# Altium PCB AccShelf2_GND_Plane.PcbDoc
Units mil, origin at the board's own origin, x right, y up, seen from the top; angles counter-clockwise.
Board outline 4881.89 x 2165.35 mil, 2 copper layers (Top Layer, Bottom Layer); 8 components, 35 nets, 114 pads, 71 vias.
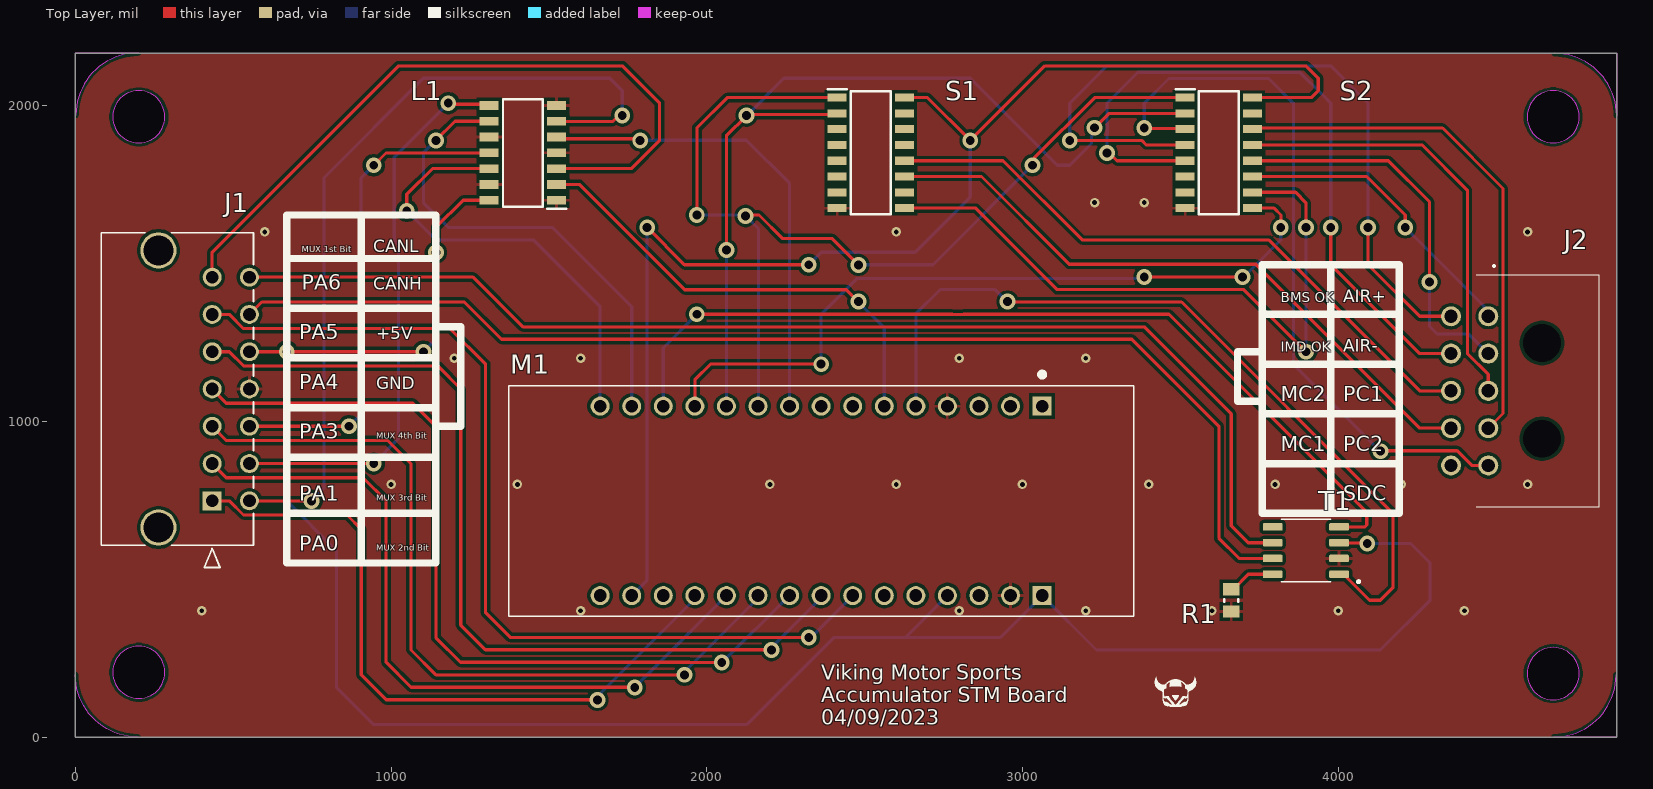
[diagram p0: Top Layer view]
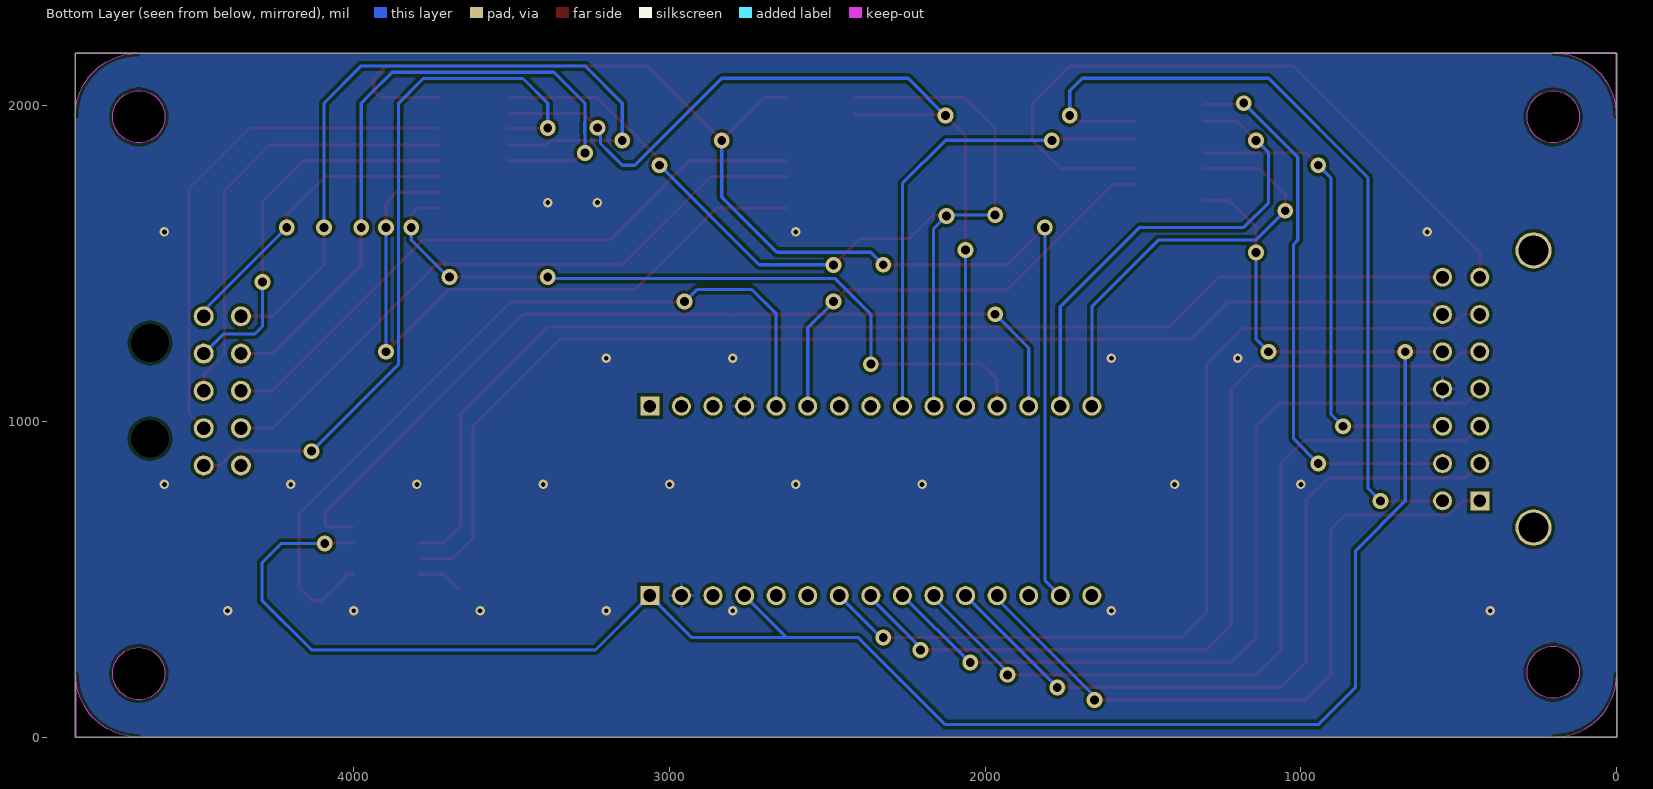
[diagram p1: Bottom Layer view, seen from below]
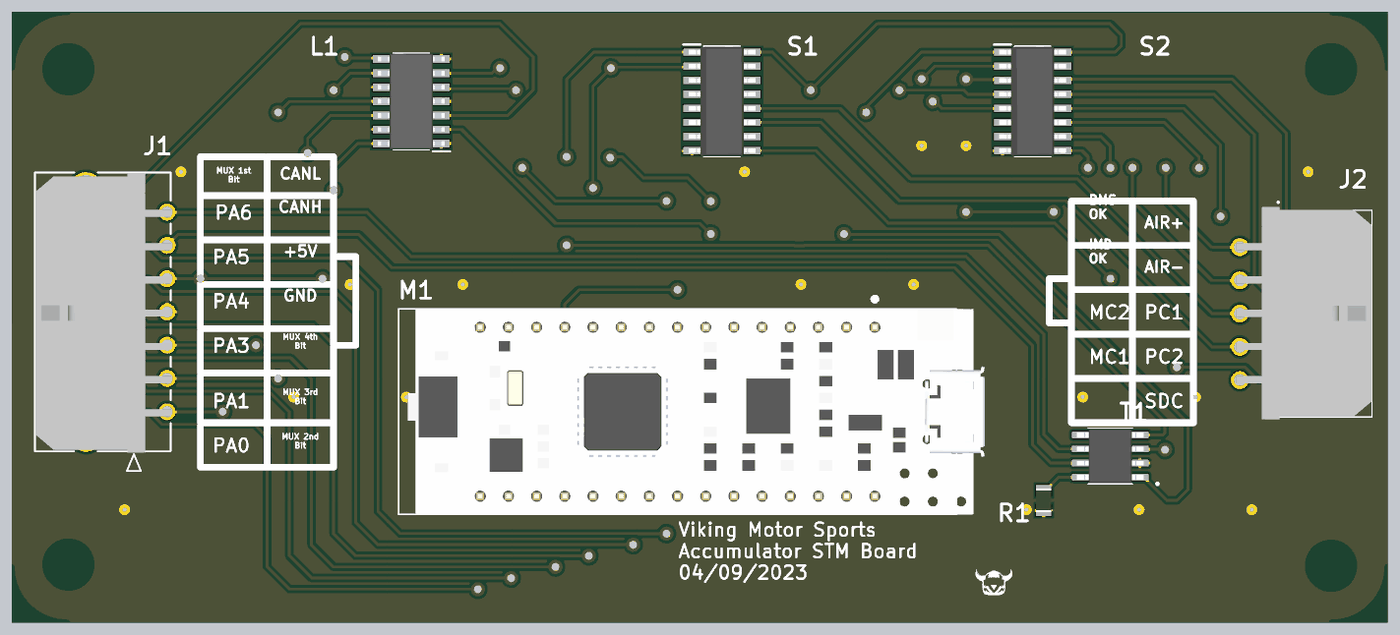
[diagram p2: 3D render of the assembled board from above, using the file's embedded part models]

## Layer stack, top to bottom
Top Solder: solder mask 0.4, Solder Resist, Dk 3.5
Top Layer: signal copper 1.4
Dielectric 1: dielectric 12.6, FR-4, Dk 4.8
Bottom Layer: signal copper 1.4
Bottom Solder: solder mask 0.4, Solder Resist, Dk 3.5

## Board outline
0,0 0,2165.35 4881.89,2165.35 4881.89,0
cut-out: 1.47,2167 198.32,2167 ccw(c198.32,1970.15) 1.47,1970.15
cut-out: 4881.89,1968.68 ccw(c4685.21,1968.68) 4685.21,2165.35 4881.89,2165.35
cut-out: 4683.68,0 ccw(c4683.68,196.68) 4880.35,196.68 4880.35,0
cut-out: 0,0 196.85,0 cw(c196.85,196.85) 0,196.85
cut-out: 118.11,1964.43 ccw(c200.79,1964.43) 200.79,1881.76 ccw(c200.79,1964.43) 283.46,1964.43 ccw(c200.79,1964.43) 200.79,2047.11 ccw(c200.79,1964.43)
cut-out: 118.11,204.99 ccw(c200.79,204.99) 200.79,122.32 ccw(c200.79,204.99) 283.46,204.99 ccw(c200.79,204.99) 200.79,287.67 ccw(c200.79,204.99)
cut-out: 4598.43,200.92 ccw(c4681.1,200.92) 4681.1,118.24 ccw(c4681.1,200.92) 4763.78,200.92 ccw(c4681.1,200.92) 4681.1,283.6 ccw(c4681.1,200.92)
cut-out: 4598.29,1964.57 ccw(c4680.97,1964.57) 4680.97,1881.89 ccw(c4680.97,1964.57) 4763.65,1964.57 ccw(c4680.97,1964.57) 4680.97,2047.24 ccw(c4680.97,1964.57)

## Design rules (kind name [scope] priority, off if disabled: settings)
Clearance [All] p1: gap=10 ignorepadtopadclearanceinfootprint=FALSE except(0: Arc-Hole Track-Hole SMDPad-Hole THPad-Hole Via-Hole Fill-Hole Poly-Hole Region-Hole Text-Hole)
PolygonConnect [All] p1: connectstyle=Relief reliefconductorwidth=10 reliefentries=4 polygonreliefangle="90 Angle" airgapwidth=10
RoutingVias [All] p1: holewidth=28 width=50 viastyle="Through Hole" minholewidth=28 minwidth=50 maxholewidth=28 maxwidth=50
SolderMaskExpansion [All] p1: expansion=4 istentingtop=FALSE
Width [All] p1: maxlimit=10 minlimit=10 preferedwidth=10
30 further rules are at their usual default settings.

## Components (designator, comment, footprint, x,y, rotation, side; value= is the part's Value field where it differs from the comment)
J1 "14 Pin Dual-Inline Connector" "14 Pin Dual In-Line Connector" 433.07,748.03 r270 top
J2 "10 Pin Dual In-Line Connector" "10 Pin Dual In-Line Connector" 4475.59,1332.68 r90 top
L1 "74AHCT125S14-13" "Level Shifter" 1417.32,1850.39 r180 top
M1 "STM32" "STM Footprint" 2362.2,748.03 r270 top
R1 "RC0805FR-0710KL" RESC2013X60X35NL10T20 3661.42,433.07 r90 top
S1 "SN74HC165QDRQ1" "Shift Register" 2519.68,1850.39 r0 top
S2 "SN74HC165QDRQ1" "Shift Register" 3622.05,1850.39 r0 top
T1 "CAN Transceiver" "CAN Transceiver" 3897.64,590.55 r180 top

## Footprints (in the part's own frame and the unit in brackets; to place one, negate y for a bottom-side part, rotate by r counter-clockwise, add the part's x,y. Pads: shape width x height; smd on the part's side, far side on the other; paste and mask are expansions set on the pad)
"10 Pin Dual In-Line Connector" [mm]
  round 1.605 hole 1.07: 1(0,0) 2(-3,0) 3(-6,0) 4(-9,0) 5(-12,0) 6(0,3) 7(-3,3) 8(-6,3) 9(-9,3) 10(-12,3)
  round 1.525 hole 3.05 unplated: MH1(-9.85,-4.32) MH2(-2.15,-4.32)
  silkscreen extent -15.33,-8.92 4.1,0.99, body extent -15.54,-8.89 3.61,3.35, height 8.78
"14 Pin Dual In-Line Connector" [mm]
  rect 1.52x1.52 / inner round 1.524 / far side rect 1.52x1.52 hole 1.02 paste-0.76 mask+0.076: 1(0,0)
  round 1.52 / inner round 1.524 / far side round 1.52 hole 1.02 paste-0.76 mask+0.076: 2(-3,0) 3(-6,0) 4(-9,0) 5(-12,0) 6(-15,0) 7(-18,0) 8(0,3) 9(-3,3) 10(-6,3) 11(-9,3) 12(-12,3) 13(-15,3) 14(-18,3)
  round 2.91 / inner round 1.524 / far side round 2.91 hole 2.41 paste-1.455 mask+0.076: P1(2.15,-4.32) P2(-20.15,-4.32)
  silkscreen extent -21.57,-8.92 5.35,3.32, body extent -21.51,-8.89 3.68,3.35, height 8.78
"CAN Transceiver" [mm]
  rrect25% 1.58x0.6 smd: 1(-2.67,1.905) 2(-2.67,0.635) 3(-2.67,-0.635) 4(-2.67,-1.905) 5(2.67,-1.905) 6(2.67,-0.635) 7(2.67,0.635) 8(2.67,1.905)
  silkscreen extent -4.35,-2.52 1.99,2.6, body extent -3,-2.45 3,2.45, height 1.76
"Level Shifter" [mm]
  rect 1.528x0.7 smd: 1(-2.711,3.81) 2(-2.711,2.54) 3(-2.711,1.27) 4(-2.711,0) 5(-2.711,-1.27) 6(-2.711,-2.54) 7(-2.711,-3.81) 8(2.711,-3.81) 9(2.711,-2.54) 10(2.711,-1.27) 11(2.711,0) 12(2.711,1.27) 13(2.711,2.54) 14(2.711,3.81)
  silkscreen extent -3.47,-4.32 1.6,4.51, body extent -10,-3.38 10,3.38, height 5.8
RESC2013X60X35NL10T20 [mm] "Chip Resistor, 2-Leads, Body 2.1x1.35mm, IPC Medium Density"
  rect 1x1.35 smd: 1(-0.9,0) 2(0.9,0)
  silkscreen extent -0.1,-0.58 0.1,0.58, body extent -1.05,-0.68 1.05,0.67, height 0.6
"Shift Register" [mm]
  rect 1.525x0.65 smd: 1(-2.712,4.445) 2(-2.712,3.175) 3(-2.712,1.905) 4(-2.712,0.635) 5(-2.712,-0.635) 6(-2.712,-1.905) 7(-2.712,-3.175) 8(-2.712,-4.445) 9(2.712,-4.445) 10(2.712,-3.175) 11(2.712,-1.905) 12(2.712,-0.635) 13(2.712,0.635) 14(2.712,1.905) 15(2.712,3.175) 16(2.712,4.445)
  silkscreen extent -3.47,-4.95 1.6,5.12, body extent -10,-3.38 10,3.38, height 5.8
"STM Footprint" [mm]
  rect 1.53x1.53 hole 1.02: 1(-7.62,17.78) 16(7.62,17.78)
  round 1.53 hole 1.02: 2(-7.62,15.24) 3(-7.62,12.7) 4(-7.62,10.16) 5(-7.62,7.62) 6(-7.62,5.08) 7(-7.62,2.54) 8(-7.62,0) 9(-7.62,-2.54) 10(-7.62,-5.08) 11(-7.62,-7.62) 12(-7.62,-10.16) 13(-7.62,-12.7) 14(-7.62,-15.24) 15(-7.62,-17.78) 17(7.62,15.24) 18(7.62,12.7) 19(7.62,10.16) 20(7.62,7.62) 21(7.62,5.08) 22(7.62,2.54) 23(7.62,0) 24(7.62,-2.54) 25(7.62,-5.08) 26(7.62,-7.62) 27(7.62,-10.16) 28(7.62,-12.7) 29(7.62,-15.24) 30(7.62,-17.78)
  silkscreen extent -10.36,-25.14 9.27,25.14, body extent -9.27,-24.29 9.27,27.71, height 8.51

## Part data
J1: "Rectangular Power Connector, 14 Contact(s), Male, Solder Terminal", Flammability Rating="UL94 V-0", Manufacturer=Molex, Manufacturer Part Number=212528-1200, Package=None, Supplier Part Number=538-212528-1200, Availability=Unavailable, Category="Headers and Wire Housings", ComponentLink1Description=http://datasheet.octopart.com/2125281200-Molex-datasheet-147959482.pdf?src-supplier=Rs, ComponentLink1URL=http://datasheet.octopart.com/2125281200-Molex-datasheet-147959482.pdf?src-supplier=Rs, ComponentLink2Description=https://datasheet.ciiva.com:443/pdfs/VipMasterIC/IC/MOLE/MOLE-S-A0003112043/MOLE-S-A0003112043-1.pdf?src-supplier=IHS+Markit, ComponentLink2URL=https://datasheet.ciiva.com:443/pdfs/VipMasterIC/IC/MOLE/MOLE-S-A0003112043/MOLE-S-A0003112043-1.pdf?src-supplier=IHS+Markit, ComponentLink3Description=https://datasheet.ciiva.com/6841/430450223-sd-6841489.pdf?src-supplier=Digi-Key, ComponentLink3URL=https://datasheet.ciiva.com/6841/430450223-sd-6841489.pdf?src-supplier=Digi-Key, Connector Type=Power,Rectangular, Contact Gender=Male, DIN Conformance=No, Empty Shell=No, Filter Feature=No, IEC Conformance=No, Mating Information="MULTIPLE MATING PARTS AVAILABLE", MF="{'manufacturer': u'Molex'}", MIL Conformance=No, Mixed Contacts=No, Mounting Technology=Board, MP=2125281200, Number of Contacts=14, Option="General Purpose", Price=None, Pricing="1=3.35000, 10=2.96000, 50=2.96000, 100=2.96000, 1000=2.28000, 10000=1.94000 (USD)", Reach SVHC Compliant=Yes, RoHS=No, RoHS Compliant=Yes, Shell Material=Polyethylene, Stock=1070, Supplier=Mouser, Termination=Solder
J2: "Connector Wire to Board Header 10 Position 3mm Solder Right Angle Thru-Hole Tray", Arrow Part Number=0430451000, Color=Black, Contact Resistance=10mR, Flammability Rating="UL94 V-0", Manufacturer=Molex, Max Operating Temperature=105°C, Max Voltage Rating (AC)=250V, Min Operating Temperature=-40°C, Mouser Part Number=N/A, Supplier Part Number=538-43045-1000, Arrow Price/Stock=https://www.arrow.com/en/products/0430451000/molex?region=europe, Category=Uncategorized, Connector Type="Male Pin", Contact Material=Brass, Contact Plating=Tin, Contact Type="Male Pin", Datasheet Link=https://www.molex.com/pdm_docs/sd/430451000_sd.pdf, Depth=12.2mm, Fastening Type=Ramp, Geometry.Height=9.02mm, Housing Color=Black, Housing Material=Polymer, Length=19.15mm, Manufacturer Part Number=0430451000, Manufacturer_Name=Molex, Manufacturer_Part_Number=0430451000, Mounting Technology="Through Hole", Mouser Price/Stock=https://www.mouser.co.uk/ProductDetail/Molex/0430451000?qs=PBcRNPEHKsoaAZSFihkrKw%3D%3D, Number of Contacts=10, Number of Positions=10, Number of Rows=2, Orientation="Right Angle", Packaging=Tray, Pitch=0.118inch, Pricing="1=2.88000, 10=2.54000, 50=2.54000, 100=2.02000, 500=1.97000, 1000=1.68000, 2448=1.55000, 4896=1.49000, 10000=1.49000, 11016=1.44000 (USD)", RoHS=Yes, RoHS Compliant=Yes, Row Spacing=0.118inch, Series="Micro-Fit 3.0™ 43045", Stock=6331, Supplier=Mouser, Termination=Solder
L1: library part "Level Shifter", "Bus Driver, AHCT/VHCT/VT Series, 4-Func, 1-Bit, True Output, CMOS, PDSO14", Case/Package=SOP, Load Capacitance (CL)=50pF, Manufacturer=Diodes, Manufacturer_Name="Diodes Inc.", Max Operating Temperature=125°C, Max Supply Voltage=5.5V, Min Operating Temperature=-40°C, Min Supply Voltage=4.5V, Mouser Part Number=621-74AHCT125S14-13, Nominal Supply Voltage=5V, Package Body Material=Plastic, Package Equivalence Code=SOP14,.25, Package Shape=Rectangular, Package Style="SMALL OUTLINEMeter", Peak Reflow Temperature (Cel)=260°C, Power Supply Current-Max (ICC)=40uA, Temperature Grade=AUTOMOTIVE, Time @ Peak Reflow Temperature-Max (s)=40s, Arrow Part Number=74AHCT125S14-13, Arrow Price/Stock=https://www.arrow.com/en/products/74ahct125s14-13/diodes-incorporated?region=nac, Category="Buffers, Drivers and Transceivers", Channels=4, ComponentLink1Description=https://datasheet.ciiva.com:443/pdfs/VipMasterIC/IC/DIOD/DIODS15860/DIODS15860-1.pdf?src-supplier=IHS+Markit, ComponentLink1URL=https://datasheet.ciiva.com:443/pdfs/VipMasterIC/IC/DIOD/DIODS15860/DIODS15860-1.pdf?src-supplier=IHS+Markit, ComponentLink2Description=https://datasheet.ciiva.com/25651/74ahct125-25651120.pdf?src-supplier=Digi-Key, ComponentLink2URL=https://datasheet.ciiva.com/25651/74ahct125-25651120.pdf?src-supplier=Digi-Key, ComponentLink3Description=https://datasheet.ciiva.com/29883/74ahct125-29883446.pdf?src-supplier=Avnet, ComponentLink3URL=https://datasheet.ciiva.com/29883/74ahct125-29883446.pdf?src-supplier=Avnet, Control Type="ENABLE LOW", Datasheet Link=http://uk.rs-online.com/web/p/products/7988941, Geometry.Height=1.73mm, Height - Seated (Max)=1.73mm, JESD-30 Code=R-PDSO-G14, JESD-609 Code=e3, Length=8.635mm, Logic Type="BUS DRIVER", Manufacturer Part Number=74AHCT125S14-13, Manufacturer_Part_Number=74AHCT125S14-13, Max I(ol)=8mA, Moisture Sensitivity Level=1, Mouser Price/Stock=https://www.mouser.co.uk/ProductDetail/Diodes-Incorporated/74AHCT125S14-13?qs=pYVYkI7xuRUA0d%2Fp2SGl5A%3D%3D, Number of Bits=1, Number of Ports=2, Output Characteristics=3-STATE, Output Polarity=True, Packaging="Tape and Reel", Pins=14, Power Supplies=5V, Pricing="2500=0.06080, 5000=0.05862, 10000=0.05686, 15000=0.05520, 20000=0.05312, 25000=0.05229, 250000=0.05146 (USD)", Prop. Delay@Nom-Sup=9.5ns, Propagation Delay (tpd)=9.5ns, Qualification Status="Not Qualified", Reach SVHC Compliant=Yes, RoHS=Yes, RoHS Compliant=Yes, Stock=22500, Supplier=Avnet, Supplier Part Number=74AHCT125S14-13, Surface Mount=Yes, Technology=CMOS, Terminal Finish=Tin, Terminal Form="Gull Wing", Terminal Pitch=1.27mm, Terminal Position=DUAL, Width=3.895mm
M1: "STM32 Nucleo-32 development board with STM32F303K8 MCU, supports Arduino connectivity", Manufacturer=STMicroelectronics, Manufacturer Part Number=NUCLEO-F303K8, Supplier Part Number=68Y1244, Category="Embedded Processors and Controllers", ComponentLink1Description=http://www.farnell.com/datasheets/2064195.pdf?src-supplier=Farnell, ComponentLink1URL=http://www.farnell.com/datasheets/2064195.pdf?src-supplier=Farnell, ComponentLink2Description=http://www.st.com/content/ccc/resource/technical/document/data_brief/b1/d8/13/d4/b0/b7/4b/6e/DM00214578.pdf/files/DM00214578.pdf/jcr:content/translations/en.DM00214578.pdf?src-supplier=Digi-Key, ComponentLink2URL=http://www.st.com/content/ccc/resource/technical/document/data_brief/b1/d8/13/d4/b0/b7/4b/6e/DM00214578.pdf/files/DM00214578.pdf/jcr:content/translations/en.DM00214578.pdf?src-supplier=Digi-Key, ComponentLink3Description=http://www.st.com/st-web-ui/static/active/en/resource/technical/document/user_manual/DM00116575.pdf?s_searchtype=keyword&src-supplier=Avnet, ComponentLink3URL=http://www.st.com/st-web-ui/static/active/en/resource/technical/document/user_manual/DM00116575.pdf?s_searchtype=keyword&src-supplier=Avnet, ComponentLink4Description=http://www.farnell.com/datasheets/1966773.pdf?src-supplier=Element14, ComponentLink4URL=http://www.farnell.com/datasheets/1966773.pdf?src-supplier=Element14, ComponentLink5Description=http://www.farnell.com/datasheets/2064195.pdf?src-supplier=Newark, ComponentLink5URL=http://www.farnell.com/datasheets/2064195.pdf?src-supplier=Newark, Core Architecture=ARM, Evaluation Kit=Yes, Lead Free="Lead Free", Number of Bits=32, Pricing="1=10.33000 (USD)", Reach SVHC Compliant=Yes, RoHS=No, Series=STM32F3, Stock=226, Supplier=Newark
R1: library part CMP-1659-00013-4, "Chip Resistor, 10 KOhm, +/- 1%, 0.125 W, -55 to 155 degC, 0805 (2012 Metric), RoHS, Tape and Reel", Manufacturer=Yageo, Max Operating Temperature="155 degC", Min Operating Temperature="-55 degC", Package Quantity=5000, Voltage Rating="150 V", ComponentLink1Description="Manufacturer URL", ComponentLink1URL=http://www.yageo.com/, ComponentLink2Description=Datasheet, ComponentLink2URL=http://www.yageo.com/documents/recent/PYu-RC_Group_51_RoHS_L_04.pdf, DatasheetVersion="Rev. 4, 02/2016", Height="0.5 mm", Length="2 mm", Mount="Surface Mount", Mounting Technology="Surface Mount", PackageDescription="2-Pin Surface Mounted Device, Body 2 x 1.25 mm", PackageReference=0805, Packaging="Tape and Reel", Pins=2, REACH SVHC="No SVHC", RoHSCompliant=true
S1 S2: library part "Shift Register", "Parallel In Serial Out, HC Series, 8-Bit, Right Direction, Complementary Output, CMOS, PDSO16", Case/Package=SOP, Manufacturer="Texas Instruments", Max Frequency@Nom-Sup=25MHz, Max Operating Temperature=125°C, Max Supply Voltage=6V, Min Operating Temperature=-40°C, Min Supply Voltage=2V, Mouser Part Number=595-SN74HC165QDRQ1, Nominal Supply Voltage=5V, Package Body Material=Plastic, Package Equivalence Code=SOP16,.25, Package Shape=Rectangular, Package Style="SMALL OUTLINEMeter", Peak Reflow Temperature (Cel)=260°C, Power Supplies=2/6V, Supplier Part Number=296-35928-1-ND, Temperature Grade=AUTOMOTIVE, Arrow Part Number=SN74HC165QDRQ1, Arrow Price/Stock=https://www.arrow.com/en/products/sn74hc165qdrq1/texas-instruments, Category="Shift Registers", Channels=1, Clock Edge Trigger Type="Positive Edge", ComponentLink1Description=https://www.ti.com:443/lit/ds/symlink/sn74hc165-q1.pdf?src-supplier=IHS+Markit, ComponentLink1URL=https://www.ti.com:443/lit/ds/symlink/sn74hc165-q1.pdf?src-supplier=IHS+Markit, ComponentLink2Description=https://datasheet.ciiva.com/18575/sn74hc165-q1-18575046.pdf?src-supplier=Digi-Key, ComponentLink2URL=https://datasheet.ciiva.com/18575/sn74hc165-q1-18575046.pdf?src-supplier=Digi-Key, ComponentLink3Description=https://datasheet.ciiva.com/18575/sn74hc165-q1-18575047.pdf?src-supplier=Digi-Key, ComponentLink3URL=https://datasheet.ciiva.com/18575/sn74hc165-q1-18575047.pdf?src-supplier=Digi-Key, ComponentLink4Description=https://datasheet.ciiva.com/18575/sn74hc165-q1-18575048.pdf?src-supplier=Digi-Key, ComponentLink4URL=https://datasheet.ciiva.com/18575/sn74hc165-q1-18575048.pdf?src-supplier=Digi-Key, ComponentLink5Description=https://datasheet.ciiva.com/48704/001074775-da-01-en-ic-shift-regi-sn74hc165qdrq1-soic-16-tid-48704119.pdf?src-supplier=Conrad, ComponentLink5URL=https://datasheet.ciiva.com/48704/001074775-da-01-en-ic-shift-regi-sn74hc165qdrq1-soic-16-tid-48704119.pdf?src-supplier=Conrad, Count Direction=RIGHT, Datasheet Link=http://www.ti.com/lit/gpn/sn74hc165-q1, fmax-Min=25MHz, Geometry.Height=1.75mm, Height - Seated (Max)=1.75mm, JESD-30 Code=R-PDSO-G16, JESD-609 Code=e4, Length=9.9mm, Logic Type="PARALLEL IN SERIAL OUT", Manufacturer Part Number=SN74HC165QDRQ1, Manufacturer_Name="Texas Instruments", Manufacturer_Part_Number=SN74HC165QDRQ1, Moisture Sensitivity Level=1, Mouser Price/Stock=https://www.mouser.co.uk/ProductDetail/Texas-Instruments/SN74HC165QDRQ1?qs=AgY10sKTvDLN6%2Fwfup846w%3D%3D, Number of Bits=8, Output Polarity=Complementary, Pins=16, Pricing="1=0.62000, 10=0.54200, 25=0.50920, 100=0.41570, 250=0.38612, 500=0.32860, 1000=0.26288 (USD)", Propagation Delay (tpd)=225ns, Qualification Status="Not Qualified", Reach SVHC Compliant=Yes, RoHS=Yes, RoHS Compliant=Yes, Supplier=Digi-Key, Surface Mount=Yes, Technology=CMOS, Terminal Finish=Nickel, Terminal Form="Gull Wing", Terminal Pitch=1.27mm, Terminal Position=DUAL, Width=3.9mm
T1: "1/1 Transceiver Half CAN 8-SOIC", Case/Package=SOIC, Manufacturer=Microchip, Manufacturer Part Number=MCP2551-I/SN, Max Operating Temperature=85°C, Max Supply Current=75mA, Max Supply Voltage=5.5V, Min Operating Temperature=-40°C, Min Supply Voltage=4.5V, Operating Supply Voltage=5V, Package=None, Package Body Material=Plastic, Package Quantity=100, Package Shape=Rectangular, Peak Reflow Temperature (Cel)=260°C, Supplier Part Number=69K7604, Temperature Grade=INDUSTRIAL, Time @ Peak Reflow Temperature-Max (s)=40s, Availability=Unavailable, Category="Interface ICs", Channels=1, ComponentLink1Description=https://datasheet.ciiva.com/27056/2040583-27056423.pdf?src-supplier=Jameco, ComponentLink1URL=https://datasheet.ciiva.com/27056/2040583-27056423.pdf?src-supplier=Jameco, ComponentLink2Description=https://datasheet.ciiva.com/8084/jp011797-8084592.pdf?src-supplier=Avnet, ComponentLink2URL=https://datasheet.ciiva.com/8084/jp011797-8084592.pdf?src-supplier=Avnet, ComponentLink3Description=https://datasheet.ciiva.com/14152/eb644223-644224-e-14152540.pdf?src-supplier=Distrelec, ComponentLink3URL=https://datasheet.ciiva.com/14152/eb644223-644224-e-14152540.pdf?src-supplier=Distrelec, ComponentLink4Description=https://datasheet.ciiva.com/1495/21667f-1495089.pdf?src-supplier=Element14, ComponentLink4URL=https://datasheet.ciiva.com/1495/21667f-1495089.pdf?src-supplier=Element14, ComponentLink5Description=https://datasheet.ciiva.com/1700/21667f-1700023.pdf?src-supplier=Digi-Key, ComponentLink5URL=https://datasheet.ciiva.com/1700/21667f-1700023.pdf?src-supplier=Digi-Key, Contact Plating=Tin,Matte, Data Rate=1Mbps, Height=1.25mm, Interface=Serial,CAN, JESD-30 Code=R-PDSO-G8, Lead Free="Lead Free", Length=4.9mm, Logic Function=Transceiver, Moisture Sensitivity Level=1, Mounting Technology="Surface Mount", MP=MCP2551-I/SN, Nominal Supply Current=75mA, Nominal Supply Voltage=5.5V, Number of Drivers=1, Number of Receive Buffers=1, Number of Receivers=1, Number of Terminals/Pins=8, Number of Transceivers=1, Number of Transmit Buffers=1, Packaging=Rail/Tube, Pins=8, Price=None, Pricing="1=1.37000, 10=1.32000, 25=1.26000, 50=1.26000, 100=1.25000 (USD)", Radiation Hardening=No, Reach SVHC Compliant=Yes, RoHS=Yes, RoHS Compliant=Yes, Slew Rate=8.5V/µs, Stock=47560, Supplier=Newark, Supply Current=75mA, Surface Mount=Yes, Terminal Finish=Tin, Terminal Form="Gull Wing", Terminal Position=DUAL, Width=3.9mm

## Via types
v1: diameter 50, hole 28, Top Layer to Bottom Layer, tented both sides, 46 vias
v2: diameter 30, hole 15, Top Layer to Bottom Layer, 25 vias

## Nets (pads, with @x,y where several pads share a name; then routed paths per layer and width w, separated by ;. In a path a pad name is that pad's centre, name@x,y a point inside that pad or via, vN(x,y) a via of type N, cw(c..) or ccw(c..) an arc to the next point about the centre after c; other vN are vias at no path point)
"+5 V": J1.12 L1.14 M1.16 M1.19 T1.3 | length 6735
  Top Layer w10: J1.12 v1(669.29,1220.47) v1(1102.36,1220.47) ; v1(1141.73,1534.8) 1141.73,1614.17 1227.95,1700.39 L1.14 ; T1.3 4003.97,614.33 4090.71,614.33 v1(4091.93,613.12)
  Bottom Layer w10: v1(669.29,1220.47) 669.29,748.03 826.77,590.55 826.77,157.48 944.88,39.37 2125.98,39.37 2401.57,314.96 2629.13,314.96 ; v1(1102.36,1220.47) 1141.73,1259.84 v1(1141.73,1534.8) ; M1.19 2629.13,314.96 ; v1(4091.93,613.12) 4229.4,613.12 4291.34,551.18 4291.34,433.07 4133.86,275.59 3234.65,275.59 M1.16 2929.13,314.96 2629.13,314.96
AIR+: J2.1 S2.11 | length 963.2
  Top Layer w10: S2.11 4090.75,1775.39 4212.6,1653.54 v1(4212.6,1614.17)
  Bottom Layer w10: v1@4213.23,1613.54 4461.9,1364.88 4461.9,1360.77 4475.59,1347.07 J2.1
AIR-: J2.2 S2.12 | length 1230.4
  Top Layer w10: S2.12 4158.86,1825.39 4289.21,1695.04 v1(4289.21,1441.7)
  Bottom Layer w10: v1(4289.21,1441.7) 4289.21,1301.34 4314.48,1276.07 4414.08,1276.07 J2.2
BMS_OK: J2.6 S2.4 | length 2374.9
  Top Layer w10: v1(3149.61,1889.76) 3377.21,1889.76 3391.58,1875.39 S2.4 ; v1(4094.49,1614.17) 4094.49,1496.06 4257.87,1332.68 J2.6
  Bottom Layer w10: v1(3149.61,1889.76) 3149.61,2007.87 3267.72,2125.98 3976.38,2125.98 4094.49,2007.87 v1(4094.49,1614.17)
CANH: J1.13 T1.7 | length 3801.7
  Top Layer w10: J1.13 590.55,1377.95 1231.56,1377.95 1349.67,1259.84 3346.46,1259.84 3622.05,984.25 3622.05,629.92 3686.42,565.55 T1.7
CANL: J1.14 T1.6 | length 3797.3
  Top Layer w10: J1.14 1259.84,1456.69 1417.32,1299.21 3385.83,1299.21 3661.42,1023.62 3661.42,669.29 3715.16,615.55 T1.6
GND: J1.11 L1.1 L1.4 L1.7 L1.10 L1.13 M1.4 M1.17 R1.1 S1.8 S2.8 T1.2
  other v2: 400,400 1600,400 2800,400 3200,400 3600,400 4000,400 4400,400 1000,800 1400,800 2200,800 2600,800 3000,800 3400,800 3800,800 4200,800 4600,800 1200,1200 1600,1200 2800,1200 3200,1200 600,1600 2600,1600 4600,1600 3228.35,1692.91 3385.83,1692.91
IMD_OK: J2.7 S2.5 | length 2215.7
  Top Layer w10: v1(3267.72,1849.76) 3274.91,1849.76 3299.28,1825.39 S2.5 ; v1(3976.38,1614.17) 3976.38,1496.06 4257.87,1214.57 J2.7
  Bottom Layer w10: v1(3267.72,1849.76) 3267.72,1911.94 3268.35,1912.57 3268.35,1945.7 3267.72,1946.33 3267.72,2007.87 3365.83,2105.98 3878.27,2105.98 3951.85,2032.4 3976.38,2007.87 v1(3976.38,1614.17)
MC1_MC: J2.9 S1.11 | length 2061.2
  Top Layer w10: S1.11 2870.28,1775.39 3148.35,1497.32 3738.9,1497.32 4257.87,978.35 J2.9
MC1_PC: J2.3 S2.13 | length 1403.1
  Top Layer w10: S2.13 4266.34,1875.39 4409.45,1732.28 4409.45,1214.81 4475.59,1148.67 J2.3
MC2_MC: J2.8 S1.12 | length 2033
  Top Layer w10: S1.12 2938.39,1825.39 3188.98,1574.8 3779.53,1574.8 4257.87,1096.46 J2.8
MC2_PC: J2.4 S2.14 | length 1652.3
  Top Layer w10: S2.14 cw(c3737.85,1916.36) 3737.85,1929.13 4330.71,1929.13 4522.19,1737.66 4522.19,1024.94 J2.4
"MUX 1st Bit": L1.2 M1.6 | length 1475.1
  Top Layer w10: L1.2 1596.06,1750.39 1929.76,1416.69 2441.57,1416.69 2479.06,1379.21 v1(2480.32,1379.21)
  Bottom Layer w10: v1(2480.32,1379.21) 2480.32,1377.95 2562.2,1296.06 M1.6
"MUX 2nd Bit": L1.5 M1.9 | length 1505
  Top Layer w10: L1.5 1529.37,1895.08 1783.55,1895.08 v1(1788.86,1889.76)
  Bottom Layer w10: v1(1788.86,1889.76) 1789.49,1890.39 2125.35,1890.39 2262.2,1753.54 M1.9
"MUX 3rd Bit": L1.9 M1.14 | length 1518.6
  Top Layer w10: v1(1141.73,1889.76) 1202.36,1950.39 L1.9
  Bottom Layer w10: v1(1141.73,1889.76) 1102.36,1850.39 1102.36,1692.91 1181.1,1614.17 1511.02,1614.17 1762.2,1362.99 M1.14
"MUX 4th Bit": L1.12 M1.15 | length 1400
  Top Layer w10: v1(1049.76,1666.78) 1049.76,1719.05 1131.1,1800.39 L1.12
  Bottom Layer w10: v1(1049.76,1666.78) 1141.73,1574.8 1450.39,1574.8 1662.2,1362.99 M1.15
NetJ1_1: J1.1 M1.27 | length 2210.1
  Top Layer w10: J1.1 487.65,748.03 532.57,703.11 860.28,703.11 905.51,657.88 905.51,196.85 984.25,118.11 1652.91,118.11 v1(1653.54,117.48)
  Bottom Layer w10: v1(1653.54,117.48) 1653.54,128.3 1962.2,436.97 M1.27
NetJ1_2: J1.2 M1.26 | length 2343.7
  Top Layer w10: J1.2 477.99,821.22 911.06,821.22 984.25,748.03 984.25,236.22 1062.99,157.48 1771.02,157.48 v1(1771.65,156.85)
  Bottom Layer w10: v1(1771.65,156.85) 1771.65,157.17 2062.2,447.72 M1.26
NetJ1_3: J1.3 M1.25 | length 2515.9
  Top Layer w10: J1.3 477.99,939.33 989.8,939.33 1062.99,866.14 1062.99,275.59 1141.73,196.85 v1(1929.13,196.85)
  Bottom Layer w10: v1(1929.13,196.85) 1929.13,205.91 2162.2,438.98 M1.25
NetJ1_4: J1.4 M1.24 | length 2667.7
  Top Layer w10: J1.4 477.99,1057.44 1068.54,1057.44 1141.73,984.25 1141.73,314.96 1219.84,236.85 1945.7,236.85 1946.33,236.22 v1(2047.24,236.22)
  Bottom Layer w10: v1(2047.24,236.22) 2048.82,236.22 2260.63,448.03 M1.24
NetJ1_5: J1.5 M1.23 | length 2838.9
  Top Layer w10: J1.5 487.65,1220.47 532.57,1175.55 1147.28,1175.55 1220.47,1102.36 1220.47,354.33 1298.58,276.22 2204.09,276.22 v1(2204.72,275.59)
  Bottom Layer w10: v1(2204.72,275.59) 2204.72,283.07 2362.2,440.55 M1.23
NetJ1_6: J1.6 M1.22 | length 2969.5
  Top Layer w10: J1.6 487.65,1338.58 532.57,1293.66 1186.65,1293.66 1299.21,1181.1 1299.21,393.7 1377.32,315.59 2221.29,315.59 2221.92,314.96 v1(2322.83,314.96)
  Bottom Layer w10: v1(2322.83,314.96) 2329.13,314.96 M1.22
NetJ1_7: J1.7 L1.3 | length 2271.1
  Top Layer w10: J1.7 433.07,1535.43 1023.62,2125.98 1732.28,2125.98 1850.39,2007.87 1850.39,1889.76 1761.02,1800.39 L1.3
NetJ1_8: J1.8 L1.6 | length 2623.2
  Top Layer w10: J1.8 v1(748.03,748.03) ; L1.6 1524.37,1950.08 1703.03,1950.08 1721.46,1968.5 v1(1732.28,1968.5)
  Bottom Layer w10: v1(748.03,748.03) 787.4,787.4 787.4,1771.65 1102.36,2086.61 1692.91,2086.61 1732.28,2047.24 v1(1732.28,1968.5)
NetJ1_9: J1.9 L1.8 | length 1776.8
  Top Layer w10: J1.9 v1(944.88,866.14) ; v1(1181.1,2007.87) 1184.84,2004.13 1306.85,2004.13 L1.8
  Bottom Layer w10: v1(944.88,866.14) 1022.99,944.25 1022.99,1560.02 1009.76,1573.25 1009.76,1836.53 v1(1181.1,2007.87)
NetJ1_10: J1.10 L1.11 | length 1556.4
  Top Layer w10: J1.10 v1(866.14,984.25) ; v1(944.88,1811.02) 983.62,1849.76 1158.3,1849.76 1158.93,1850.39 L1.11
  Bottom Layer w10: v1(866.14,984.25) 904.88,1022.99 904.88,1771.02 v1(944.88,1811.02)
NetM1_10: M1.10 S1.1 S2.1 | length 3220.3
  Top Layer w10: v1(1968.5,1653.54) 1968.5,1929.13 2064.76,2025.39 S1.1 ; v1(2122.93,1650.49) 2125.98,1653.54 2165.35,1653.54 2240.27,1578.63 2397.75,1578.63 2480.32,1496.06 v1(2480.32,1495.43) ; v1(3031.5,1811.02) 3031.5,1828.22 3228.67,2025.39 S2.1
  Bottom Layer w10: v1(1968.5,1653.54) 2119.87,1653.54 v1(2122.93,1650.49) ; v1@2125.98,1647.43 2163.78,1609.64 2163.78,1049.61 M1.10 ; v1(2480.32,1495.43) 2480.94,1496.06 2716.54,1496.06 v1(3031.5,1811.02)
NetM1_11: M1.11 S1.2 S2.2 | length 2880.6
  Top Layer w10: v1(2062.2,1542.64) 2062.2,1904.72 v1(2125.98,1968.5) 2129.43,1971.95 2409.47,1971.95 S1.2 ; v1(3228.35,1929.76) 3228.98,1929.76 3274.61,1975.39 S2.2
  Bottom Layer w10: M1.11 v1(2062.2,1542.64) ; v1(2125.98,1968.5) 2244.09,2086.61 2834.65,2086.61 3110.24,1811.02 3149.61,1811.02 3189.61,1851.02 3218.66,1880.08 3218.66,1903.28 3220.69,1905.31 3220.69,1922.11 v1(3228.35,1929.76)
NetM1_12: M1.12 S2.9 | length 2393.9
  Top Layer w10: M1.12 1962.2,1131.46 2011.84,1181.1 v1(2362.2,1181.1) ; v1(3385.83,1457.32) v1(3696.96,1457.32) ; S2.9 3797.05,1675.39 3818.9,1653.54 3818.9,1614.8 v1(3818.27,1614.17)
  Bottom Layer w10: v1(2362.2,1181.1) 2362.2,1338.58 2476.49,1452.87 3381.37,1452.87 v1(3385.83,1457.32) ; v1(3696.96,1457.32) 3701.42,1457.32 3818.27,1574.17 v1(3818.27,1614.17)
NetM1_29: M1.29 S1.16 S2.16 | length 4264.7
  Top Layer w10: v1(1811.02,1614.17) 1929.13,1496.06 v1(2322.83,1496.06) ; S1.16 2699.02,2025.39 v1(2834.65,1889.76) 3070.87,2125.98 3897.64,2125.98 3937.01,2086.61 3937.01,2047.24 3915.16,2025.39 S2.16
  Bottom Layer w10: M1.29 1811.02,496.85 v1(1811.02,1614.17) ; v1(2322.83,1496.06) 2362.2,1535.43 2659.97,1535.43 2834.65,1710.11 v1(2834.65,1889.76)
NetR1_2: R1.2 T1.8 | length 150.6
  Top Layer w10: R1.2 3668.31,468.5 3715.35,515.55 T1.8
NetS1_9: S1.9 S2.10 | length 2115.5
  Top Layer w10: S1.9 2852.17,1675.39 3110.24,1417.32 3700.79,1417.32 3897.64,1220.47 v1(3898.27,1220.47) ; S2.10 3865.16,1725.39 3897.64,1692.91 3897.64,1614.8 v1(3898.27,1614.17)
  Bottom Layer w10: v1(3898.27,1220.47) 3897.95,1220.79 3897.95,1613.86 v1(3898.27,1614.17)
RX: M1.13 T1.4 | length 2849.5
  Top Layer w10: v1(1968.5,1339.21) 2777.45,1339.21 2778.71,1337.95 2811.84,1337.95 2813.1,1339.21 3463.94,1339.21 4090.75,712.4 4090.75,671.41 4084.89,665.55 T1.4
  Bottom Layer w10: M1.13 1862.2,1232.28 1968.5,1338.58 v1(1968.5,1339.21)
"SDC END": J2.5 S2.3 | length 2325
  Top Layer w10: v1(3385.83,1929.13) 3387.7,1927.26 3513.41,1927.26 S2.3 ; v1(4133.86,905.51) 4135.18,906.83 4376.78,906.83 4423.37,860.24 J2.5
  Bottom Layer w10: v1(3385.83,1929.13) 3385.83,2007.87 3463.94,2085.98 3780.16,2085.98 3858.27,2007.87 3858.27,1181.1 v1(4133.86,905.51)
TX: M1.5 T1.1 | length 2589.7
  Top Layer w10: v1(2952.76,1379.21) 2954.02,1377.95 3503.94,1377.95 4173.23,708.66 4173.23,472.44 4133.86,433.07 4099.38,433.07 4028.86,503.59 4028.86,508.74 4022.05,515.55 T1.1
  Bottom Layer w10: M1.5 2662.2,1340.82 2738.71,1417.32 2778.08,1417.32 2778.71,1417.95 2811.84,1417.95 2812.47,1417.32 2913.39,1417.32 2951.5,1379.21 v1(2952.76,1379.21)
pads on no net: J1.P1 J1.P2 J2.10 J2.MH1 J2.MH2 M1.1 M1.2 M1.3 M1.7 M1.8 M1.18 M1.20 M1.21 M1.28 M1.30 S1.3 S1.4 S1.5 S1.6 S1.7 S1.10 S1.13 S1.14 S1.15 S2.6 S2.7 S2.15 T1.5

## Polygon pours and split planes (outlines as drawn)
GND on Top Layer "GND_L01_P000" (solid, pour order 0): 1.47,2167 3.11,2165.35 4881.89,2165.35 4881.89,1.54 4880.35,0 0,0
GND on Bottom Layer "GND_L02_P001" (solid, pour order 1): 1.47,2167 3.11,2165.35 4881.89,2165.35 4881.89,1.54 4880.35,0 0,0

## Silkscreen, mask and mechanical layers (free items; w line width, h text height)
Top Overlay:
  drawing of 33 lines, arcs and shapes, not listed
  text "MUX 1st Bit" at 716.56,1535.43 h19.68
  text "CANL" at 943.59,1535.43 h39.37
  text "PA6" at 716.56,1417.32 h47.24
  text "CANH" at 943.59,1417.32 h39.37
  text "BMS OK" at 3818.9,1377.95 h31.5
  text "AIR+" at 4015.75,1377.95 h39.37
  text "PA5" at 708.66,1259.84 h47.24
  text "+5V" at 952.78,1259.84 h39.37
  text "IMD OK" at 3818.9,1220.47 h31.5
  text "AIR-" at 4015.75,1220.47 h39.37
  text "PA4" at 708.66,1102.36 h47.24
  text "GND" at 952.78,1102.36 h39.37
  text "MC2" at 3818.9,1062.99 h47.24
  text "PC1" at 4015.75,1062.99 h47.24
  text "PA3" at 708.66,944.88 h47.24
  text "MUX 4th Bit" at 952.78,944.88 h19.68
  text "MC1" at 3818.9,905.51 h47.24
  text "PC2" at 4015.75,905.51 h47.24
  text "PA1" at 708.66,748.03 h47.24
  text "MUX 3rd Bit" at 952.78,748.03 h19.68
  text "SDC" at 4015.75,748.03 h47.24
  text "PA0" at 708.66,590.55 h47.24
  text "MUX 2nd Bit" at 952.78,590.55 h19.68
  text "Viking Motor Sports / Accumulator STM Board / 04/09/2023" at 2362.2,39.37 h47.24